# Altium PCB arduino_mega_giga_shield_template.pcbdoc
Units mm, origin at the board's own origin, x right, y up, seen from the top; angles counter-clockwise.
Board outline 101.6 x 53.34 mm, 2 copper layers (Top Layer, Bottom Layer); 7 components, 79 nets, 84 pads, 0 vias.
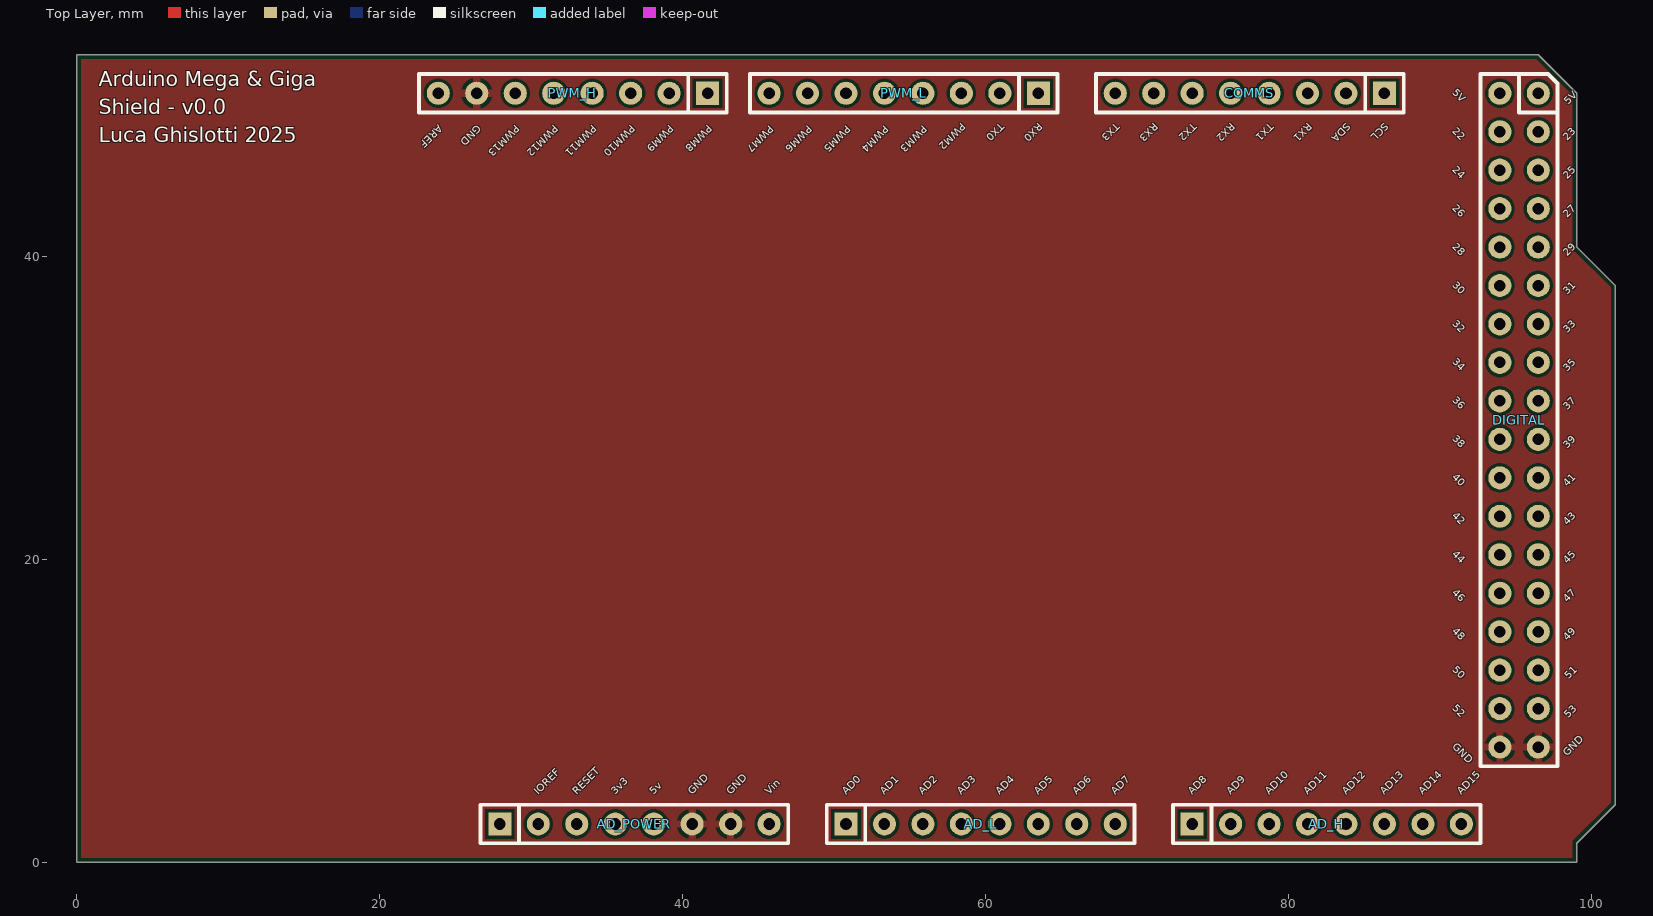
[diagram p0: Top Layer view]
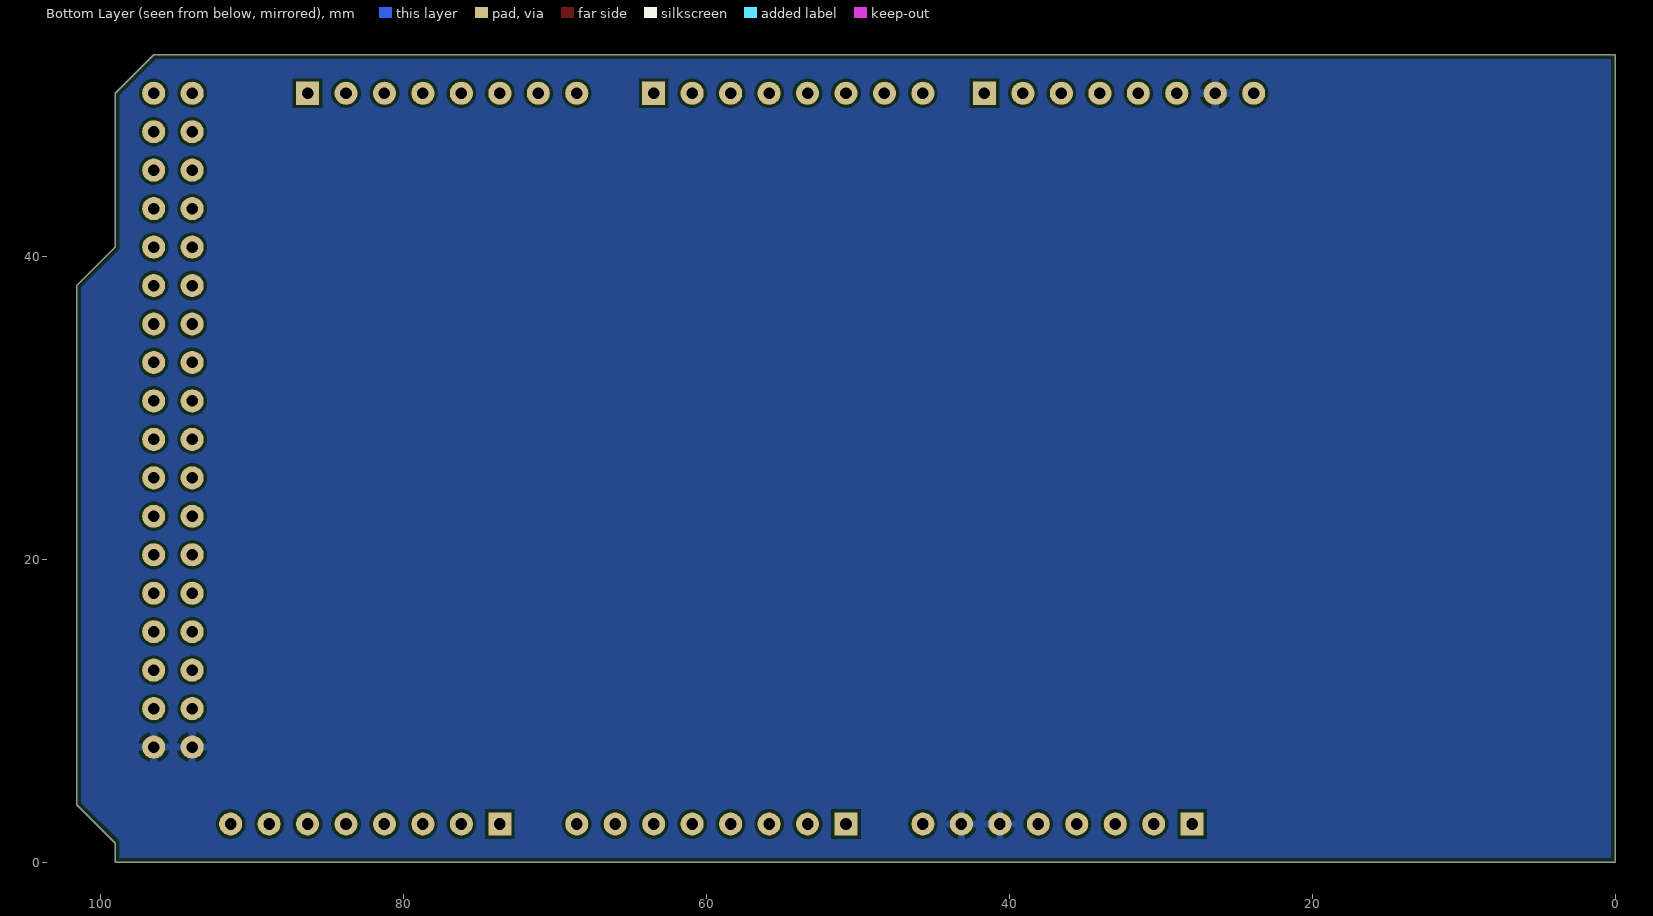
[diagram p1: Bottom Layer view, seen from below]

## Layer stack, top to bottom
Top Solder: solder mask 0.0102, Solder Resist, Dk 3.5
Top Layer: signal copper 0.0356
Dielectric1: dielectric 0.32, FR-4, Dk 4.8
Bottom Layer: signal copper 0.0356
Bottom Solder: solder mask 0.0102, Solder Resist, Dk 3.5

## Board outline
0,0 0,53.34 96.52,53.34 99.06,50.8 99.06,40.64 101.6,38.1 101.6,3.81 99.06,1.27 99.06,0

## Design rules (kind name [scope] priority, off if disabled: settings)
BoardOutlineClearance [All] p1: gap=0.3 ignorepadtopadclearanceinfootprint=FALSE except(0.4: Arc-SplitBarrior Arc-SplitContinuation Track-SplitBarrior Track-SplitContinuation SMDPad-SplitBarrior SMDPad-SplitContinuation THPad-SplitBarrior THPad-SplitContinuation Via-SplitBarrior Via-SplitContinuation Fill-SplitBarrior Fill-SplitContinuation Poly-SplitBarrior Poly-SplitContinuation Region-SplitBarrior Region-SplitContinuation Text-SplitBarrior Text-SplitContinuation)
Clearance "Clearance Different Nets" [All] p1: gap=0.2 ignorepadtopadclearanceinfootprint=FALSE except(0.089: Arc-Arc Arc-Track Arc-SMDPad Track-Track Track-SMDPad; 0.127: SMDPad-SMDPad SMDPad-Via THPad-Via Via-Via; 0.254: Arc-Via Arc-Text Track-Via Track-Text SMDPad-Text THPad-Text Via-Text Fill-Text Poly-Text Region-Text Text-Text; 0.5: THPad-THPad Via-Hole)
Clearance "Clearance Same Nets" [All] p2: gap=0.2 ignorepadtopadclearanceinfootprint=FALSE except(0.089: Arc-Arc Arc-Track Arc-SMDPad Track-Track Track-SMDPad SMDPad-SMDPad; 0.127: SMDPad-Via THPad-Via; 0.254: Arc-Via Arc-Text Track-Via Track-Text SMDPad-Text THPad-Text Via-Via Via-Text Fill-Text Poly-Text Region-Text Text-Text)
Clearance "Clearance Bottom Layer" [OnLayer('Bottom Layer')] p3: gap=0.203 ignorepadtopadclearanceinfootprint=TRUE except(0.254: Arc-Text Track-Text SMDPad-Text THPad-Text Via-Text Fill-Text Poly-Text Region-Text Text-Text)
Clearance "Clearance Top Layer" [OnLayer('Top Layer')] p4: gap=0.203 ignorepadtopadclearanceinfootprint=TRUE except(0.254: Arc-Text Track-Text SMDPad-Text THPad-Text Via-Text Fill-Text Poly-Text Region-Text Text-Text)
HoleSize [All] p1: absolutevalues=TRUE maxlimit=6.3 minlimit=0.2 maxpercent=80.000 minpercent=20.000
MinimumAnnularRing [All] p1: minimumring=0.13
MinimumSolderMaskSliver [All] p1: minsoldermaskwidth=0.1
PolygonConnect PolygonConnect_1 [All] p1: thpad.connectstyle=Relief thpad.reliefconductorwidth=0.508 thpad.reliefentries=4 thpad.polygonreliefangle="90 Angle" thpad.airgapwidth=0.254 smdpad.connectstyle=Relief smdpad.reliefconductorwidth=0.508 smdpad.reliefentries=4 smdpad.polygonreliefangle="90 Angle" smdpad.airgapwidth=0.254 via.connectstyle=Direct via.reliefconductorwidth=0.508 via.reliefentries=4 via.polygonreliefangle="90 Angle" via.airgapwidth=0.254
RoutingCorners [All] p1: cornerstyle=Round minsetback=2.54 maxsetback=2.54
RoutingVias [All] p1: holewidth=0.5 width=1 viastyle="Through Hole" minholewidth=0.2 minwidth=0.35 maxholewidth=1 maxwidth=2
SilkToSilkClearance [All] p1: silktosilkclearance=0.1
SilkToSolderMaskClearance [IsPad] p1: minsilkscreentomaskgap=0.1 clearancetoexposedcopper=TRUE
SolderMaskExpansion [All] p1: expansion=0.102 istentingtop=FALSE
Width [All] p1: maxlimit=2.54 minlimit=0.089 preferedwidth=0.381
25 further rules are at their usual default settings.

## Components (designator, comment, footprint, x,y, rotation, side; value= is the part's Value field where it differs from the comment)
AD_H "AD_H" "Header 8x1 8.5mm" 73.66,2.54 r0 top locked
AD_L "AD_L" "Header 8x1 8.5mm" 50.8,2.54 r0 top locked
AD_POWER "AD_POWER" "Header 8x1 8.5mm" 27.94,2.54 r0 top locked
COMMS "Communication" "Header 8x1 8.5mm" 86.36,50.8 r180 top locked
DIGITAL "IO_36" "HEADER 36X 8MM" 96.52,50.8 r270 top locked
PWM_H "PWM_H" "Header 8x1 8.5mm" 41.656,50.8 r180 top locked
PWM_L "PWM_L" "Header 8x1 8.5mm" 63.5,50.8 r180 top locked

## Footprints (in the part's own frame and the unit in brackets; to place one, negate y for a bottom-side part, rotate by r counter-clockwise, add the part's x,y. Pads: shape width x height; smd on the part's side, far side on the other; paste and mask are expansions set on the pad)
"Header 8x1 8.5mm" [mil] "Stackable 8 pin header"
  rect 60x60 hole 30: 1(0,0)
  round 60 hole 30: 2(100,0) 3(200,0) 4(300,0) 5(400,0) 6(500,0) 7(600,0) 8(700,0)
  silkscreen extent -50,-50 750,50, body extent -50,-50 750,50, height 335
"HEADER 36X 8MM" [mil] "Stackable 10 pin header"
  round 60 hole 30: 1(0,0) 2(0,-100) 3(100,0) 4(100,-100) 5(200,0) 6(200,-100) 7(300,0) 8(300,-100) 9(400,0) 10(400,-100) 11(500,0) 12(500,-100) 13(600,0) 14(600,-100) 15(700,0) 16(700,-100) 17(800,0) 18(800,-100) 19(900,-100) 20(900,0) 21(1000,0) 22(1000,-100) 23(1100,0) 24(1100,-100) 25(1200,0) 26(1200,-100) 27(1300,0) 28(1300,-100) 29(1400,0) 30(1400,-100) 31(1500,0) 32(1500,-100) 33(1600,0) 34(1600,-100) 35(1700,0) 36(1700,-100)
  silkscreen extent -50,-150 1750,50, body extent -50,-150 1750,50, height 335

## Part data
AD_H PWM_L: Supplier Part Number 1=2698940, Supplier 1=Arrow, Supplier 2=Arrow, Supplier 3=Digi-Key, Supplier 4=Arrow, Supplier Part Number 2=2698939, Supplier Part Number 3=SAM1198-08-ND, Supplier Part Number 4=2698925
AD_L COMMS PWM_H: Supplier Part Number 1=SAM1198-08-ND, Supplier 1=Digi-Key, Supplier 2=Arrow, Supplier 3=Arrow, Supplier 4=Arrow
  AD_L: Supplier 5=Arrow, Supplier Part Number 2=2698939, Supplier Part Number 3=2698940, Supplier Part Number 4=43085273, Supplier Part Number 5=2698925
  COMMS PWM_H: Supplier Part Number 2=2698940, Supplier Part Number 3=2698939, Supplier Part Number 4=2698925
AD_POWER: library part AD_L, Supplier Part Number 1=SAM1198-08-ND, Supplier 1=Digi-Key, Supplier 2=Arrow, Supplier 3=Arrow, Supplier 4=Arrow, Supplier 5=Arrow, Supplier Part Number 2=2698939, Supplier Part Number 3=2698940, Supplier Part Number 4=43085273, Supplier Part Number 5=2698925
DIGITAL: Supplier Part Number 1=SAM1196-18-ND, Supplier 1=Digi-Key, Supplier 2=Arrow, Supplier 3=Arrow, Supplier 4=Arrow, Supplier 5=Arrow, Supplier Part Number 2=48117090, Supplier Part Number 3=46093326, Supplier Part Number 4=2698278, Supplier Part Number 5=2698268

## Nets (pads, with @x,y where several pads share a name; then routed paths per layer and width w, separated by ;. In a path a pad name is that pad's centre, name@x,y a point inside that pad or via, vN(x,y) a via of type N, cw(c..) or ccw(c..) an arc to the next point about the centre after c; other vN are vias at no path point)
3V3: AD_POWER.4
5V1: AD_POWER.5
5V2: DIGITAL.1
5V3: DIGITAL.2
AD0: AD_L.1
AD1: AD_L.2
AD2: AD_L.3
AD3: AD_L.4
AD4: AD_L.5
AD5: AD_L.6
AD6: AD_L.7
AD7: AD_L.8
AD8: AD_H.1
AD9: AD_H.2
AD10: AD_H.3
AD11: AD_H.4
AD12: AD_H.5
AD13: AD_H.6
AD14: AD_H.7
AD15: AD_H.8
AREF: PWM_H.8
GND: AD_POWER.6 AD_POWER.7 DIGITAL.35 DIGITAL.36 PWM_H.7
IO22: DIGITAL.4
IO23: DIGITAL.3
IO24: DIGITAL.6
IO25: DIGITAL.5
IO26: DIGITAL.8
IO27: DIGITAL.7
IO28: DIGITAL.10
IO29: DIGITAL.9
IO30: DIGITAL.12
IO31: DIGITAL.11
IO32: DIGITAL.14
IO33: DIGITAL.13
IO34: DIGITAL.16
IO35: DIGITAL.15
IO36: DIGITAL.18
IO37: DIGITAL.17
IO38: DIGITAL.20
IO39: DIGITAL.19
IO40: DIGITAL.22
IO41: DIGITAL.21
IO42: DIGITAL.24
IO43: DIGITAL.23
IO44: DIGITAL.26
IO45: DIGITAL.25
IO46: DIGITAL.28
IO47: DIGITAL.27
IO48: DIGITAL.30
IO49: DIGITAL.29
IO50: DIGITAL.32
IO51: DIGITAL.31
IO52: DIGITAL.34
IO53: DIGITAL.33
IOREF: AD_POWER.2
PWM2: PWM_L.3
PWM3: PWM_L.4
PWM4: PWM_L.5
PWM5: PWM_L.6
PWM6: PWM_L.7
PWM7: PWM_L.8
PWM8: PWM_H.1
PWM9: PWM_H.2
PWM10: PWM_H.3
PWM11: PWM_H.4
PWM12: PWM_H.5
PWM13: PWM_H.6
RESET: AD_POWER.3
RX0: PWM_L.1
RX1: COMMS.3
RX2: COMMS.5
RX3: COMMS.7
SCL: COMMS.1
SDA: COMMS.2
TX0: PWM_L.2
TX1: COMMS.4
TX2: COMMS.6
TX3: COMMS.8
VIN: AD_POWER.8
pads on no net: AD_POWER.1

## Polygon pours and split planes (outlines as drawn)
GND on Top Layer "GND_L01_P003" (solid, pour order 3): 0,53.34 96.52,53.34 99.06,50.8 99.06,40.64 101.6,38.1 101.6,3.81 99.06,1.27 99.06,0 0,0
GND on Bottom Layer "GND_L02_P001" (solid, pour order 1): 0,53.34 96.52,53.34 99.06,50.8 99.06,40.64 101.6,38.1 101.6,3.81 99.06,1.27 99.06,0 0,0

## Silkscreen, mask and mechanical layers (free items; w line width, h text height)
Top Overlay:
  text "Arduino Mega & Giga" at 1.454,51.269 h1
  text "5V" at 90.805,50.8 h0.51 r315
  text "5V" at 98.5,50 h0.51 r45
  text "Shield - v0.0" at 1.454,49.412 h1
  text "PWM2" at 58.42,48.895 h0.51 r225
  text "TX0" at 60.96,48.895 h0.51 r225
  text "RX0" at 63.5,48.895 h0.51 r225
  text "TX3" at 68.58,48.895 h0.51 r225
  text "RX3" at 71.12,48.895 h0.51 r225
  text "TX2" at 73.66,48.895 h0.51 r225
  text "RX2" at 76.2,48.895 h0.51 r225
  text "TX1" at 78.74,48.895 h0.51 r225
  text "RX1" at 81.28,48.895 h0.51 r225
  text "SDA" at 83.82,48.895 h0.51 r225
  text "SCL" at 86.36,48.895 h0.51 r225
  text "AREF" at 23.876,48.768 h0.51 r225
  text "GND" at 26.416,48.768 h0.51 r225
  text "PWM13" at 28.956,48.768 h0.51 r225
  text "PWM12" at 31.496,48.768 h0.51 r225
  text "PWM11" at 34.036,48.768 h0.51 r225
  text "PWM10" at 36.576,48.768 h0.51 r225
  text "PWM9" at 39.116,48.768 h0.51 r225
  text "PWM8" at 41.656,48.768 h0.51 r225
  text "PWM7" at 45.72,48.715 h0.51 r225
  text "PWM6" at 48.26,48.715 h0.51 r225
  text "PWM5" at 50.8,48.715 h0.51 r225
  text "PWM4" at 53.34,48.715 h0.51 r225
  text "PWM3" at 55.88,48.715 h0.51 r225
  text "22" at 90.805,48.26 h0.51 r315
  text "23" at 98.425,47.625 h0.51 r45
  text "Luca Ghislotti 2025" at 1.454,47.554 h1
  text "24" at 90.805,45.72 h0.51 r315
  text "25" at 98.425,45.085 h0.51 r45
  text "26" at 90.805,43.18 h0.51 r315
  text "27" at 98.425,42.545 h0.51 r45
  text "28" at 90.805,40.64 h0.51 r315
  text "29" at 98.425,40.005 h0.51 r45
  text "30" at 90.805,38.1 h0.51 r315
  text "31" at 98.425,37.465 h0.51 r45
  text "32" at 90.805,35.56 h0.51 r315
  text "33" at 98.425,34.925 h0.51 r45
  text "34" at 90.805,33.02 h0.51 r315
  text "35" at 98.425,32.385 h0.51 r45
  text "36" at 90.805,30.48 h0.51 r315
  text "37" at 98.425,29.845 h0.51 r45
  text "38" at 90.805,27.94 h0.51 r315
  text "39" at 98.425,27.305 h0.51 r45
  text "40" at 90.805,25.4 h0.51 r315
  text "41" at 98.425,24.765 h0.51 r45
  text "42" at 90.805,22.86 h0.51 r315
  text "43" at 98.425,22.225 h0.51 r45
  text "44" at 90.805,20.32 h0.51 r315
  text "45" at 98.425,19.685 h0.51 r45
  text "46" at 90.805,17.78 h0.51 r315
  text "47" at 98.425,17.145 h0.51 r45
  text "48" at 90.805,15.24 h0.51 r315
  text "49" at 98.425,14.605 h0.51 r45
  text "50" at 90.805,12.7 h0.51 r315
  text "51" at 98.545,12.065 h0.51 r45
  text "52" at 90.805,10.16 h0.51 r315
  text "53" at 98.5,9.5 h0.51 r45
  text "GND" at 90.805,7.62 h0.51 r315
  text "GND" at 98.425,6.985 h0.51 r45
  text "IOREF" at 30.48,4.445 h0.51 r45
  text "RESET" at 33.02,4.445 h0.51 r45
  text "3v3" at 35.56,4.445 h0.51 r45
  text "5v" at 38.1,4.445 h0.51 r45
  text "GND" at 40.64,4.445 h0.51 r45
  text "GND" at 43.18,4.445 h0.51 r45
  text "Vin" at 45.72,4.445 h0.51 r45
  text "AD0" at 50.8,4.445 h0.51 r45
  text "AD1" at 53.34,4.445 h0.51 r45
  text "AD2" at 55.88,4.445 h0.51 r45
  text "AD3" at 58.42,4.445 h0.51 r45
  text "AD4" at 60.96,4.445 h0.51 r45
  text "AD5" at 63.5,4.445 h0.51 r45
  text "AD6" at 66.04,4.445 h0.51 r45
  text "AD7" at 68.58,4.445 h0.51 r45
  text "AD8" at 73.66,4.445 h0.51 r45
  text "AD9" at 76.2,4.445 h0.51 r45
  text "AD10" at 78.74,4.445 h0.51 r45
  text "AD11" at 81.28,4.445 h0.51 r45
  text "AD12" at 83.82,4.445 h0.51 r45
  text "AD13" at 86.36,4.445 h0.51 r45
  text "AD14" at 88.9,4.445 h0.51 r45
  text "AD15" at 91.44,4.445 h0.51 r45